# Altium PCB PCB.PcbDoc (part 2 of 2)
Units mil, origin at the board's own origin, x right, y up, seen from the top; angles counter-clockwise.
Board outline 6000 x 4000 mil, 2 copper layers (Top Layer, Bottom Layer); 94 components, 44 nets, 296 pads, 0 vias.
Unrouted connection lines stored in the file: 197.
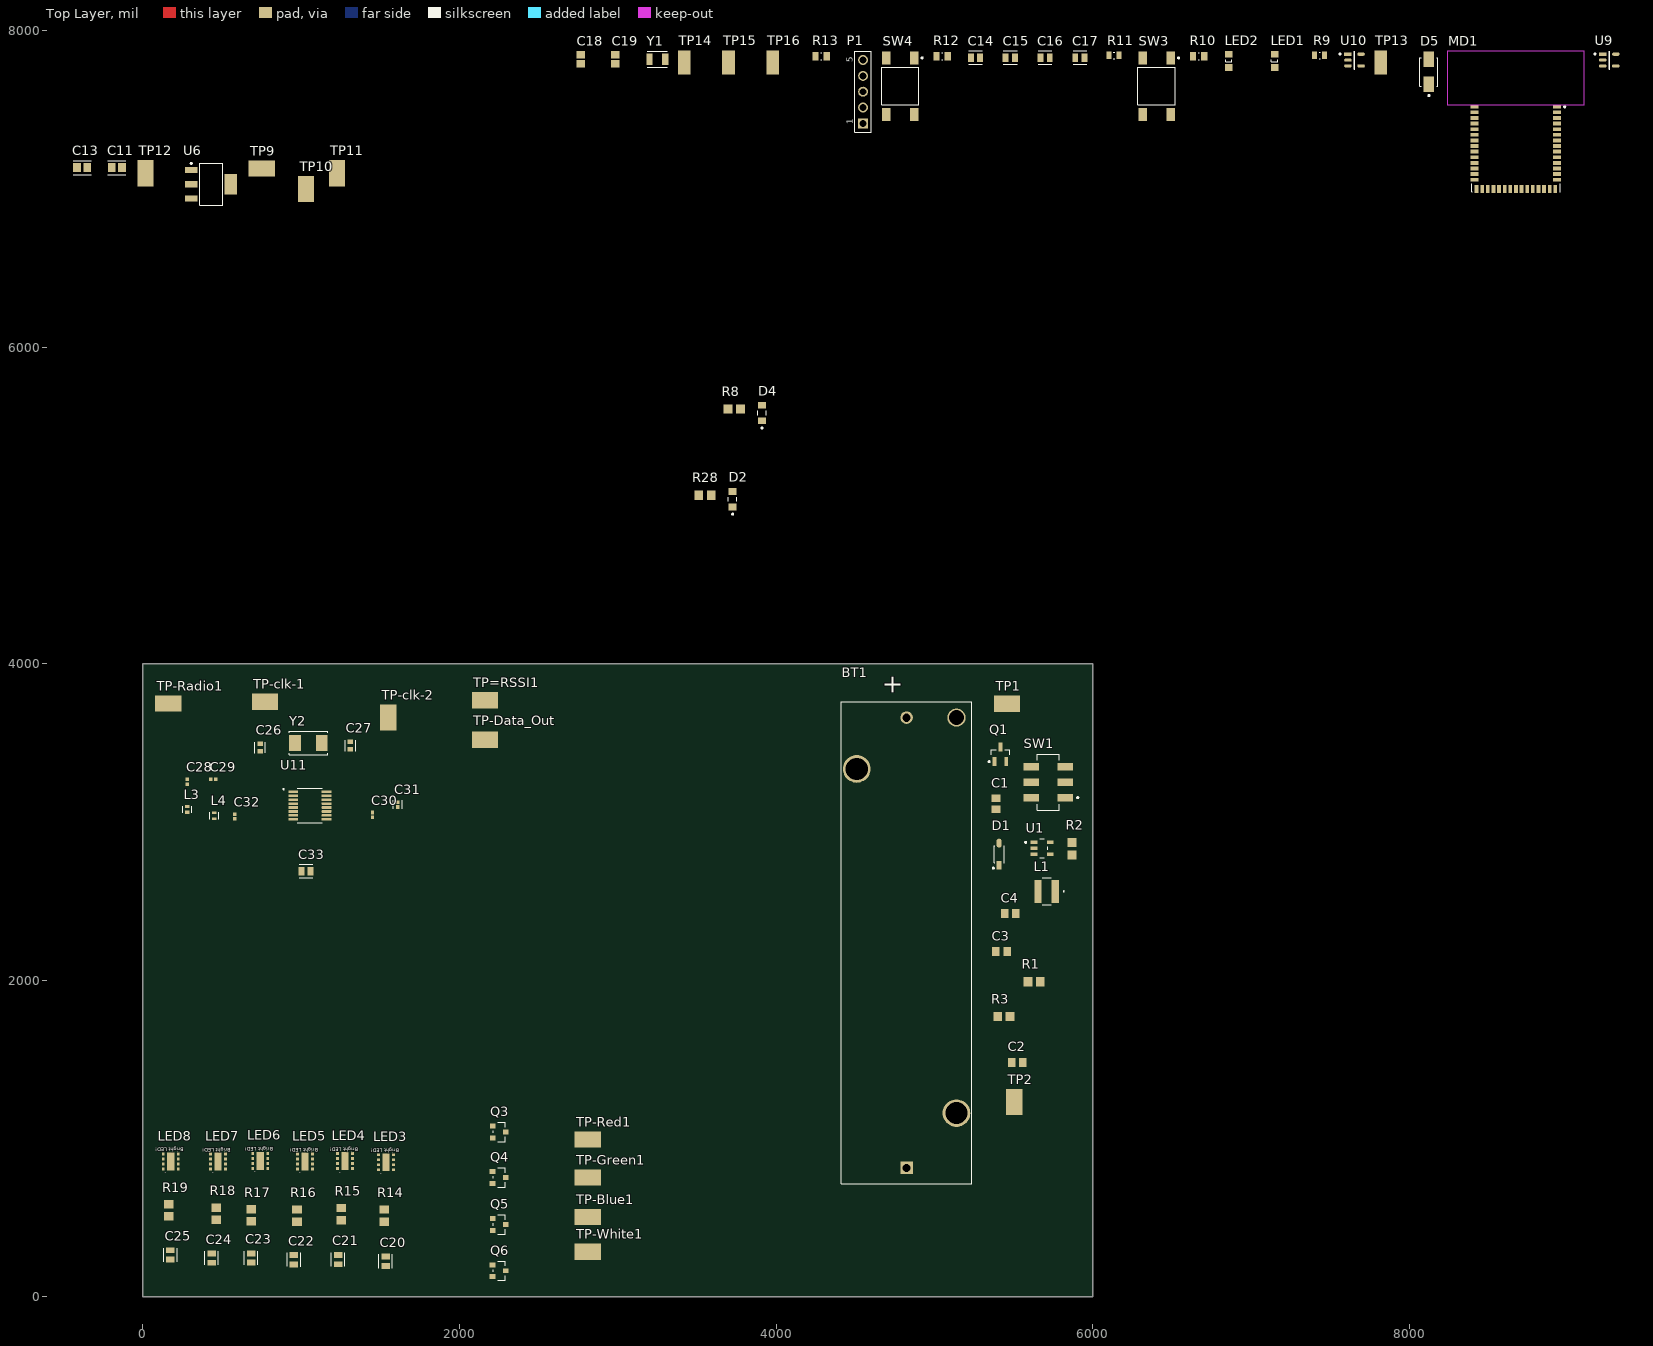
[diagram p0: Top Layer view]

## Part data (continued)
R2: "RES SMD 10K OHM 1% 1/8W 0805", Case Code (Imperial)=0805, Case Code (Metric)=2012, Manufacturer 1=Yageo, Manufacturer Part Number 1=RC0805FR-0710KL, Max Operating Temperature=155°C, Max Power Dissipation=125mW, Min Operating Temperature=-55°C, Package Quantity=1, Resistance=100kR, Resistance Tolerance=1%, Resistor Type="Thick Film", Supplier Part Number 1=311-10.0KCRCT-ND, Temperature Coefficient=100ppm/°C, Voltage Rating=150V, Case/Package=0805, Category="Chip SMD Resistors", ComponentLink1Description=https://datasheet.ciiva.com/11808/0900766b8106beab-11808151.pdf?src-supplier=RSComponents, ComponentLink1URL=https://datasheet.ciiva.com/11808/0900766b8106beab-11808151.pdf?src-supplier=RSComponents, ComponentLink2Description=https://datasheet.ciiva.com/12669/rc0805-12669688.pdf?src-supplier=Mouser, ComponentLink2URL=https://datasheet.ciiva.com/12669/rc0805-12669688.pdf?src-supplier=Mouser, ComponentLink3Description=https://datasheet.ciiva.com/46447/444164-46447563.pdf?src-supplier=Element14, ComponentLink3URL=https://datasheet.ciiva.com/46447/444164-46447563.pdf?src-supplier=Element14, ComponentLink4Description=https://datasheet.ciiva.com/2456/pyu-r-int-thick-7-2456972.pdf?src-supplier=Digi-Key, ComponentLink4URL=https://datasheet.ciiva.com/2456/pyu-r-int-thick-7-2456972.pdf?src-supplier=Digi-Key, ComponentLink5Description=https://datasheet.ciiva.com/2456/pyu-r-int-thick-7-2456973.pdf?src-supplier=Digi-Key, ComponentLink5URL=https://datasheet.ciiva.com/2456/pyu-r-int-thick-7-2456973.pdf?src-supplier=Digi-Key, ComponentLink6Description=https://datasheet.ciiva.com/2456/pyu-r-int-thick-7-2456974.pdf?src-supplier=Digi-Key, ComponentLink6URL=https://datasheet.ciiva.com/2456/pyu-r-int-thick-7-2456974.pdf?src-supplier=Digi-Key, ComponentLink7Description=https://datasheet.ciiva.com/16747/rc0805-16747087.pdf?src-supplier=Future+Electronics, ComponentLink7URL=https://datasheet.ciiva.com/16747/rc0805-16747087.pdf?src-supplier=Future+Electronics, Construction=Rectangular, Depth=1.25mm, Features="Moisture Resistant", Height=0.024inch, Lead Free="Lead Free", Length=2mm, Military Standard=Not, Number of Terminations=2, Packaging="Tape and Reel", Power Rating=125mW, Pricing 1="1=0.10000, 10=0.04200, 100=0.01690, 1000=0.00759, 2500=0.00659 (USD)", REACH SVHC=Unknown, RoHS=Yes, RoHS Compliant=Yes, Series=RC, Size Code=0805, Stock 1=7562122, Supplier 1=Digi-Key, Technology="THICK FILM", Termination=SMD/SMT, Tolerance=1%, Width=0.049inch
R3: "RES SMD 10K OHM 1% 1/8W 0805", Case Code (Imperial)=0805, Case Code (Metric)=2012, Manufacturer 1=Yageo, Manufacturer Part Number 1=RC0805FR-0710KL, Max Operating Temperature=155°C, Max Power Dissipation=125mW, Min Operating Temperature=-55°C, Package Quantity=1, Resistance=10kR, Resistance Tolerance=1%, Resistor Type="Thick Film", Supplier Part Number 1=311-10.0KCRCT-ND, Temperature Coefficient=100ppm/°C, Voltage Rating=150V, Case/Package=0805, Category="Chip SMD Resistors", ComponentLink1Description=https://datasheet.ciiva.com/11808/0900766b8106beab-11808151.pdf?src-supplier=RSComponents, ComponentLink1URL=https://datasheet.ciiva.com/11808/0900766b8106beab-11808151.pdf?src-supplier=RSComponents, ComponentLink2Description=https://datasheet.ciiva.com/12669/rc0805-12669688.pdf?src-supplier=Mouser, ComponentLink2URL=https://datasheet.ciiva.com/12669/rc0805-12669688.pdf?src-supplier=Mouser, ComponentLink3Description=https://datasheet.ciiva.com/46447/444164-46447563.pdf?src-supplier=Element14, ComponentLink3URL=https://datasheet.ciiva.com/46447/444164-46447563.pdf?src-supplier=Element14, ComponentLink4Description=https://datasheet.ciiva.com/2456/pyu-r-int-thick-7-2456972.pdf?src-supplier=Digi-Key, ComponentLink4URL=https://datasheet.ciiva.com/2456/pyu-r-int-thick-7-2456972.pdf?src-supplier=Digi-Key, ComponentLink5Description=https://datasheet.ciiva.com/2456/pyu-r-int-thick-7-2456973.pdf?src-supplier=Digi-Key, ComponentLink5URL=https://datasheet.ciiva.com/2456/pyu-r-int-thick-7-2456973.pdf?src-supplier=Digi-Key, ComponentLink6Description=https://datasheet.ciiva.com/2456/pyu-r-int-thick-7-2456974.pdf?src-supplier=Digi-Key, ComponentLink6URL=https://datasheet.ciiva.com/2456/pyu-r-int-thick-7-2456974.pdf?src-supplier=Digi-Key, ComponentLink7Description=https://datasheet.ciiva.com/16747/rc0805-16747087.pdf?src-supplier=Future+Electronics, ComponentLink7URL=https://datasheet.ciiva.com/16747/rc0805-16747087.pdf?src-supplier=Future+Electronics, Construction=Rectangular, Depth=1.25mm, Features="Moisture Resistant", Height=0.024inch, Lead Free="Lead Free", Length=2mm, Military Standard=Not, Number of Terminations=2, Packaging="Tape and Reel", Power Rating=125mW, Pricing 1="1=0.10000, 10=0.04200, 100=0.01690, 1000=0.00759, 2500=0.00659 (USD)", REACH SVHC=Unknown, RoHS=Yes, RoHS Compliant=Yes, Series=RC, Size Code=0805, Stock 1=7562122, Supplier 1=Digi-Key, Technology="THICK FILM", Termination=SMD/SMT, Tolerance=1%, Width=0.049inch
R8 R28: library part RES_0805_R_330.00, "RES 330 OHM 1% 1/8W 0805", Case Code (Imperial)=0805, Case Code (Metric)=2012, Manufacturer 1="Stackpole Electronics", Manufacturer Part Number 1=RMCF0805FT330R, Max Operating Temperature=155°C, Max Power Dissipation=125mW, Min Operating Temperature=-55°C, Resistance=330R, Resistor Type="Thick Film", Supplier Part Number 1=RMCF0805FT330RCT-ND, Temperature Coefficient=100ppm/°C, Tolerance=1%, Case/Package=0805, Category="Chip SMD Resistors", ComponentLink1Description=http://components.arrow.com/part/dataview/40963487S9848862N1174?src-supplier=Arrow+Electronics, ComponentLink1URL=http://components.arrow.com/part/dataview/40963487S9848862N1174?src-supplier=Arrow+Electronics, ComponentLink2Description=https://www.seielect.com/catalog/SEI-RMCF_RMCP.pdf?src-supplier=Avnet, ComponentLink2URL=https://www.seielect.com/catalog/SEI-RMCF_RMCP.pdf?src-supplier=Avnet, ComponentLink3Description=https://www.seielect.com/Catalog/SEI-RMCF_RMCP.pdf?src-supplier=Digi-Key, ComponentLink3URL=https://www.seielect.com/Catalog/SEI-RMCF_RMCP.pdf?src-supplier=Digi-Key, ComponentLink4Description=https://www.seielect.com/catalog/SEI-Packaging.pdf?src-supplier=Digi-Key, ComponentLink4URL=https://www.seielect.com/catalog/SEI-Packaging.pdf?src-supplier=Digi-Key, ComponentLink5Description=https://www.verical.com/server-webapp/html/getDatasheet?partID=559884&src-supplier=Verical, ComponentLink5URL=https://www.verical.com/server-webapp/html/getDatasheet?partID=559884&src-supplier=Verical, Construction=Rectangular, Contact Plating=Tin,Matte, Depth=1.25mm, Features="Automotive AEC-Q200", Height=0.026inch, Lead Free="Lead Free", Length=0.079inch, Military Standard=Not, Mount="Surface Mount", Number of Terminations=2, Packaging="Tape and Reel", Pricing 1="1=0.10000, 10=0.02700, 100=0.01090, 1000=0.00488, 2500=0.00423 (USD)", Radiation Hardening=No, RoHS=Yes, RoHS Compliant=Yes, Series=RMCF, Stock 1=205996, Supplier 1=Digi-Key, Width=0.049inch
R9 R11: library part CMP-2000-06960-1, "Chip Resistor, 330 Ohm, +/- 1%, 125 mW, -55 to 155 degC, 0805 (2012 Metric), RoHS, Tape and Reel", Case Code (Imperial)=0805, Case Code (Metric)=2012, Manufacturer=Yageo, Max Operating Temperature=155°C, Max Power Dissipation=125mW, Min Operating Temperature=-55°C, Operating Temperature Range=-55Cto+155C, Package Description="2-Pin Surface Mounted Device, Body 2 x 1.25 mm", Package Quantity=5000, Power Rating=125mW(1/8W), Resistance=330Ohms, Resistance Tolerance=1%, Resistor Type="Thick Film", Supplier Part Number 1=311-330CRCT-ND, Temperature Coefficient=100PPM/C, Voltage Rating=150V, Case Code - in=0805, Case Code - mm=2012, Case/Package=0805, Category="Chip SMD Resistors", ComponentLink1Description=https://datasheet.ciiva.com/2457/pyu-r-int-thick-7-2457015.pdf?src-supplier=Digi-Key, ComponentLink1URL=https://datasheet.ciiva.com/2457/pyu-r-int-thick-7-2457015.pdf?src-supplier=Digi-Key, ComponentLink2Description=https://datasheet.ciiva.com/2457/pyu-r-int-thick-7-2457016.pdf?src-supplier=Digi-Key, ComponentLink2URL=https://datasheet.ciiva.com/2457/pyu-r-int-thick-7-2457016.pdf?src-supplier=Digi-Key, ComponentLink3Description=https://datasheet.ciiva.com/2457/pyu-r-int-thick-7-2457014.pdf?src-supplier=Digi-Key, ComponentLink3URL=https://datasheet.ciiva.com/2457/pyu-r-int-thick-7-2457014.pdf?src-supplier=Digi-Key, ComponentLink4Description=https://datasheet.ciiva.com/12667/rc0805-12667925.pdf?src-supplier=Mouser, ComponentLink4URL=https://datasheet.ciiva.com/12667/rc0805-12667925.pdf?src-supplier=Mouser, ComponentLink5Description=https://datasheet.ciiva.com/7941/444164-7941768.pdf?src-supplier=Element14, ComponentLink5URL=https://datasheet.ciiva.com/7941/444164-7941768.pdf?src-supplier=Element14, ComponentLink6Description=https://datasheet.ciiva.com/7941/444164-7941769.pdf?src-supplier=Element14, ComponentLink6URL=https://datasheet.ciiva.com/7941/444164-7941769.pdf?src-supplier=Element14, ComponentLink7Description=https://datasheet.ciiva.com/16740/rc0805-16740975.pdf?src-supplier=Future+Electronics, ComponentLink7URL=https://datasheet.ciiva.com/16740/rc0805-16740975.pdf?src-supplier=Future+Electronics, Construction=Rectangular, Datasheet URL=http://www.yageo.com/documents/recent/PYu-RC_Group_51_RoHS_L_7.pdf, Datasheet Version="Rev. 7, 05/2017", Depth=1.25mm, Features="Moisture Resistant", Height=0.024inch, Lead Free="Lead Free", Length=2mm, Manufacturer 1=Yageo, Manufacturer Part Number 1=RC0805FR-07330RL, Manufacturer URL=http://www.yageo.com/, Military Standard=Not, Mounting Technology=SurfaceMount, Number of Terminations=2, Package Reference=0805, Packaging=Reel, Pricing 1="1=0.10000, 10=0.03800, 100=0.01560, 1000=0.00699, 2500=0.00607 (USD)", Product=ThickFilmResistorsGeneralPurpose, REACH SVHC=Unknown, RoHS=Yes, RoHS Compliant=Yes, Series=RC, Size Code=0805, Stock 1=1406392, Supplier 1=Digi-Key, Termination=SMD/SMT, Termination Style=SMD/SMT, Tolerance=1%, Width=0.049inch
R10 R12 R13: library part CMP-1659-00013-4, "Chip Resistor, 10 KOhm, +/- 1%, 0.125 W, -55 to 155 degC, 0805 (2012 Metric), RoHS, Tape and Reel", Case Code (Imperial)=0805, Case Code (Metric)=2012, Manufacturer=Yageo, Max Operating Temperature="155 degC", Max Power Dissipation=125mW, Min Operating Temperature="-55 degC", Package Quantity=5000, Resistance=10kR, Resistance Tolerance=1%, Resistor Type="Thick Film", Supplier Part Number 1=311-10.0KCRCT-ND, Temperature Coefficient=100ppm/°C, Voltage Rating="150 V", Case/Package=0805, Category="Chip SMD Resistors", ComponentLink1Description="Manufacturer URL", ComponentLink1URL=http://www.yageo.com/, ComponentLink2Description=Datasheet, ComponentLink2URL=http://www.yageo.com/documents/recent/PYu-RC_Group_51_RoHS_L_04.pdf, ComponentLink3Description=https://datasheet.ciiva.com/11808/0900766b8106beab-11808151.pdf?src-supplier=RSComponents, ComponentLink3URL=https://datasheet.ciiva.com/11808/0900766b8106beab-11808151.pdf?src-supplier=RSComponents, ComponentLink4Description=https://datasheet.ciiva.com/46447/444164-46447563.pdf?src-supplier=Element14, ComponentLink4URL=https://datasheet.ciiva.com/46447/444164-46447563.pdf?src-supplier=Element14, ComponentLink5Description=https://datasheet.ciiva.com/2456/pyu-r-int-thick-7-2456973.pdf?src-supplier=Digi-Key, ComponentLink5URL=https://datasheet.ciiva.com/2456/pyu-r-int-thick-7-2456973.pdf?src-supplier=Digi-Key, ComponentLink6Description=https://datasheet.ciiva.com/2456/pyu-r-int-thick-7-2456974.pdf?src-supplier=Digi-Key, ComponentLink6URL=https://datasheet.ciiva.com/2456/pyu-r-int-thick-7-2456974.pdf?src-supplier=Digi-Key, ComponentLink7Description=https://datasheet.ciiva.com/2456/pyu-r-int-thick-7-2456972.pdf?src-supplier=Digi-Key, ComponentLink7URL=https://datasheet.ciiva.com/2456/pyu-r-int-thick-7-2456972.pdf?src-supplier=Digi-Key, ComponentLink8Description=https://datasheet.ciiva.com/12669/rc0805-12669688.pdf?src-supplier=Mouser, ComponentLink8URL=https://datasheet.ciiva.com/12669/rc0805-12669688.pdf?src-supplier=Mouser, ComponentLink9Description=https://datasheet.ciiva.com/16747/rc0805-16747087.pdf?src-supplier=Future+Electronics, ComponentLink9URL=https://datasheet.ciiva.com/16747/rc0805-16747087.pdf?src-supplier=Future+Electronics, Construction=Rectangular, DatasheetVersion="Rev. 4, 02/2016", Depth=1.25mm, Features="Moisture Resistant", Height="0.5 mm", Lead Free="Lead Free", Length="2 mm", Manufacturer 1=Yageo, Manufacturer Part Number 1=RC0805FR-0710KL, Military Standard=Not, Mount="Surface Mount", Mounting Technology="Surface Mount", Number of Terminations=2, PackageDescription="2-Pin Surface Mounted Device, Body 2 x 1.25 mm", PackageReference=0805, Packaging="Tape and Reel", Pins=2, Power Rating=125mW, Pricing 1="1=0.10000, 10=0.03800, 100=0.01560, 1000=0.00702, 2500=0.00610 (USD)", REACH SVHC="No SVHC", RoHS=Yes, RoHS Compliant=Yes, RoHSCompliant=true, Series=RC, Size Code=0805, Stock 1=5682818, Supplier 1=Digi-Key, Technology="THICK FILM", Termination=SMD/SMT, Tolerance=1%, Width=0.049inch
R14 R15 R16 R17 R18 R19: library part CMP-2001-03134-1, Manufacturer=Susumu, Part Number=RL1220S-100-F
SW1: "C & K COMPONENTS - JS202011SCQN - SWITCH, DPDT, 0.6A, 6VDC, SMD", Actuator Color=Black, Contact Current Rating=300mA, Contact Resistance=70mR, Flammability Rating="UL94 V-2", Manufacturer 1="ITT C&K", Max Operating Temperature=85°C, Max Voltage Rating (DC)=6V, Min Operating Temperature=-20°C, Package Quantity=1, Supplier Part Number 1=401-2002-1-ND, Actuator Length=2mm, Actuator Material=Nylon,Polyamide,PA46, Actuator Type=Standard, Category="Slide Switches", ComponentLink1Description=https://datasheet.ciiva.com/2889/js-29aug13-2889127.pdf?src-supplier=Digi-Key, ComponentLink1URL=https://datasheet.ciiva.com/2889/js-29aug13-2889127.pdf?src-supplier=Digi-Key, ComponentLink2Description=https://datasheet.ciiva.com/23829/1707718-23829488.pdf?src-supplier=Newark, ComponentLink2URL=https://datasheet.ciiva.com/23829/1707718-23829488.pdf?src-supplier=Newark, ComponentLink3Description=https://datasheet.ciiva.com/8625/js-9dec14-8625470.pdf?src-supplier=Avnet, ComponentLink3URL=https://datasheet.ciiva.com/8625/js-9dec14-8625470.pdf?src-supplier=Avnet, ComponentLink4Description=https://datasheet.ciiva.com/2889/js-15sept15-2889128.pdf?src-supplier=Digi-Key, ComponentLink4URL=https://datasheet.ciiva.com/2889/js-15sept15-2889128.pdf?src-supplier=Digi-Key, ComponentLink5Description=https://datasheet.ciiva.com/2889/js-15sept15-2889129.pdf?src-supplier=Digi-Key, ComponentLink5URL=https://datasheet.ciiva.com/2889/js-15sept15-2889129.pdf?src-supplier=Digi-Key, ComponentLink6Description=https://datasheet.ciiva.com/22630/1707718-22630697.pdf?src-supplier=Element14, ComponentLink6URL=https://datasheet.ciiva.com/22630/1707718-22630697.pdf?src-supplier=Element14, Contact Material="Copper Alloy", Contact Plating=Silver, Current Rating=300mA, Depth=7.5mm, Electrical Life=5000Cycles, Housing Material=Nylon, Lead Free="Lead Free", Length=9mm, Manufacturer Part Number 1=JS202011SCQN, Max Current Rating=300mA, Mount="Surface Mount", Orientation=Vertical, Packaging="Tape and Reel", Pricing 1="1=0.55000, 10=0.53000, 25=0.51040, 100=0.44180, 250=0.40252, 500=0.37306 (USD)", Radiation Hardening=No, REACH SVHC="No SVHC", RoHS=Yes, Series=JS, Stock 1=21096, Supplier 1=Digi-Key, Switch Function=On-On, Switch Travel=2mm, Termination="Gull Wing", Throw Configuration=DPDT, Voltage Rating (DC)=6V
SW3 SW4: library part CMP-2000-05602-2, "Swicth, SPST, 24 V, -35 to 85 degC, 4-Pin SMD, RoHS, Tape and Reel", Case/Package=SMD/SMT, Color=Black, Contact Current Rating=50mA, Contact Resistance=100mOhm, Insulation Resistance=100MR, Manufacturer="TE Connectivity", Max Operating Temperature=85degC, Max Voltage Rating (DC)=12V, Min Operating Temperature=-35degC, Operating Force=1.57N, Package Description="4-Pin Surface Mount Device, Body 6 x 6 mm, Pitch 4.5 mm", Package Quantity=750, Supplier Part Number 1=450-1129-ND, Voltage Rating=24V, Actuator Length=0.055inch, Actuator Material=Polyamide, Actuator Type=Standard, Case\/Package=SMD/SMT, Category="Pushbutton Switches", Contact Material=CopperAlloy, Contact Plating=Silver, Current Rating=50mA, Datasheet URL=http://www.te.com/commerce/DocumentDelivery/DDEController?Action=showdoc&DocId=Customer+Drawing%7F2-1437565-7%7FV%7Fpdf%7FEnglish%7FENG_CD_2-1437565-7_V.pdf%7F4-1437565-2, Datasheet Version="Rev. V, 02/2015", Depth=10mm, Electrical Life=100000Cycles, ELV=Compliant, Illumination Type=Illuminated, Lead Free="Lead Free", Length=6mm, Manufacturer 1="TE Connectivity", Manufacturer Part Number 1=FSM4JSMA, Manufacturer URL=http://www.te.com/, Max Current Rating=50mA, Mechanical Life=100000Cycles, Mount=SurfaceMount, Mounting Technology=SurfaceMount, Orientation=Straight, Package Reference=FSM4JSMA, Packaging=LoosePiece, Pricing 1="1=0.27000, 10=0.26300, 25=0.24960, 100=0.22600, 250=0.20604, 750=0.19152, 1500=0.16339, 3000=0.15885, 5250=0.14977 (USD)", Radiation Hardening=No, REACH SVHC=Unknown, RoHS=Yes, RoHS Compliant=Yes, RoHSCompliant=true, Series=FSMJSMA, Stock 1=65608, Supplier 1=Digi-Key, Switch Function=Off-Mom, Switch Travel=0.25mm, Termination=GullWing, Throw Configuration=SPST, Voltage Rating (DC)=24V, Width=6mm
TP1 TP2 TP9 TP10 TP11 TP12 TP-Blue1 TP-clk-1 TP-clk-2 TP-Data_Out TP-Green1 TP-Radio1 TP-Red1 TP-White1 TP=RSSI1: "Test Point SMD 1206", Case Size=1206, Manufacturer="TE Connectivity (Tyco Electronics)", Manufacturer Part Number=1625854-1, Operating Temperature="-55 to 125 C", Power Rating=N/R, Resistance Value="0 Ohm", Supplier Part Number=A106143CT-ND, ComponentLink1Description=https://datasheet.ciiva.com/6439/eng-ds-1773266-a-6439169.pdf, ComponentLink1URL=https://datasheet.ciiva.com/6439/eng-ds-1773266-a-6439169.pdf, ComponentLink2Description=https://datasheet.ciiva.com/30136/1773266-a-30136341.pdf, ComponentLink2URL=https://datasheet.ciiva.com/30136/1773266-a-30136341.pdf, ComponentLink3Description=https://datasheet.ciiva.com/6439/eng-ds-1773266-a-6439080.pdf, ComponentLink3URL=https://datasheet.ciiva.com/6439/eng-ds-1773266-a-6439080.pdf, ComponentLink4Description=https://datasheet.ciiva.com/6439/eng-ds-1773266-a-6439081.pdf, ComponentLink4URL=https://datasheet.ciiva.com/6439/eng-ds-1773266-a-6439081.pdf, ComponentLink5Description=https://datasheet.ciiva.com/6439/eng-ds-1773266-a-6439083.pdf, ComponentLink5URL=https://datasheet.ciiva.com/6439/eng-ds-1773266-a-6439083.pdf, Dimension="3.2 x 1.6 x 1.25mm", Family=RC, Mounting="Surface Mount", Packaging="Tape and Reel", Part No=1625854-1, Pricing 1="1=0.28, 10=0.261, 25=0.224, 50=0.1902, 100=0.1828, 250=0.1641, 500=0.1567, 1000=0.1306 (USD)", RoHS=Yes, Stock 1=31937, Supplier=Digi-Key, Temperature Coefficient=N/R, Terminal Pitch=N/R, Termination Style=N/R, Tolerance=N/R
TP13 TP14 TP15 TP16: library part CMP-1672-00008-1, "Test Point, 1 Position SMD, RoHS, Tape and Reel", Manufacturer 1="Keystone Electronics", Package Quantity=1000, Supplier Part Number 1=36-5019CT-ND, Category=Connectors, ComponentLink1Description="Manufacturer URL", ComponentLink1URL=http://www.keyelco.com/, ComponentLink2Description=Datasheet, ComponentLink2URL=http://www.keyelco.com/product-pdf.cfm?p=1357, ComponentLink3Description=https://datasheet.ciiva.com/16318/m60-2p61-16318395.pdf?src-supplier=Future+Electronics, ComponentLink3URL=https://datasheet.ciiva.com/16318/m60-2p61-16318395.pdf?src-supplier=Future+Electronics, ComponentLink4Description=https://datasheet.ciiva.com/16885/70182998-16885945.pdf?src-supplier=Allied+Electronics, ComponentLink4URL=https://datasheet.ciiva.com/16885/70182998-16885945.pdf?src-supplier=Allied+Electronics, ComponentLink5Description=https://datasheet.ciiva.com/14848/m60-2p61-14848437.pdf?src-supplier=Digi-Key, ComponentLink5URL=https://datasheet.ciiva.com/14848/m60-2p61-14848437.pdf?src-supplier=Digi-Key, ComponentLink6Description=https://datasheet.ciiva.com/14848/m60-2p61-14848438.pdf?src-supplier=Digi-Key, ComponentLink6URL=https://datasheet.ciiva.com/14848/m60-2p61-14848438.pdf?src-supplier=Digi-Key, ComponentLink7Description=https://datasheet.ciiva.com/14848/m60-2p61-14848439.pdf?src-supplier=Digi-Key, ComponentLink7URL=https://datasheet.ciiva.com/14848/m60-2p61-14848439.pdf?src-supplier=Digi-Key, Contact Material=Bronze, Contact Plating=Silver, DatasheetVersion=03/2014, Height=0.09inch, Lead Free="Lead Free", Manufacturer Part Number 1=5019, Material=Bronze, Mount="Surface Mount", Mounting Technology="Surface Mount", Number of Pins=1, PackageDescription="1-Pin Surface Mount Device, Body 3.81 x 2.03 mm", PackageReference=5019, Packaging="Tape and Reel", Pins=1, Pricing 1="1=0.34000, 25=0.27360, 100=0.22340, 250=0.20064, 500=0.19152 (USD)", REACH SVHC="No SVHC", RoHS=Yes, RoHS Compliant=Yes, RoHSCompliant=True, Series=5019, Stock 1=1316816, Supplier 1=Digi-Key, Termination=SMD/SMT
U1: "IC REG MULT CONFG ADJ 2.1A SOT23", Case/Package=SOT-23, Manufacturer 1="TI National Semiconductor", Manufacturer Part Number 1=LM2735XMF/NOPB, Max Input Voltage=5.5V, Max Operating Temperature=125°C, Max Output Current=3A, Max Output Voltage=24V, Min Input Voltage=2.7V, Min Operating Temperature=-40°C, Min Output Voltage=3V, Nominal Supply Current=500uA, Package Quantity=1000, Quiescent Current=7mA, Supplier Part Number 1=LM2735XMF/NOPBCT-ND, Switching Frequency=1.6MHz, Category="Voltage Regulators - Switching", ComponentLink1Description=https://datasheet.ciiva.com/22669/1802021-22669478.pdf?src-supplier=Element14, ComponentLink1URL=https://datasheet.ciiva.com/22669/1802021-22669478.pdf?src-supplier=Element14, ComponentLink2Description=https://datasheet.ciiva.com/3220/lm2735-3220073.pdf?src-supplier=Avnet, ComponentLink2URL=https://datasheet.ciiva.com/3220/lm2735-3220073.pdf?src-supplier=Avnet, ComponentLink3Description=https://datasheet.ciiva.com/3221/lm2735-3221644.pdf?src-supplier=Avnet, ComponentLink3URL=https://datasheet.ciiva.com/3221/lm2735-3221644.pdf?src-supplier=Avnet, ComponentLink4Description=https://datasheet.ciiva.com/6579/lm2735-6579929.pdf?src-supplier=Digi-Key, ComponentLink4URL=https://datasheet.ciiva.com/6579/lm2735-6579929.pdf?src-supplier=Digi-Key, ComponentLink5Description=https://datasheet.ciiva.com/6579/lm2735-6579933.pdf?src-supplier=Digi-Key, ComponentLink5URL=https://datasheet.ciiva.com/6579/lm2735-6579933.pdf?src-supplier=Digi-Key, ComponentLink6Description=https://datasheet.ciiva.com/6579/lm2735-6579935.pdf?src-supplier=Digi-Key, ComponentLink6URL=https://datasheet.ciiva.com/6579/lm2735-6579935.pdf?src-supplier=Digi-Key, ComponentLink7Description=https://datasheet.ciiva.com/15223/getdatasheetpartid-142075-15223063.pdf?src-supplier=Verical, ComponentLink7URL=https://datasheet.ciiva.com/15223/getdatasheetpartid-142075-15223063.pdf?src-supplier=Verical, Contact Plating=Tin,Matte, Efficiency=90%, Height=1.02mm, Lead Free="Lead Free", Length=2.92mm, Min Supply Voltage=2.7V, Mount="Surface Mount", Number of Outputs=1, Number of Pins=5, Operating Supply Voltage=5.5V, Output Current=3A, Output Type=Adjustable, Output Voltage=24V, Packaging="Tape and Reel", Pricing 1="1=2.27000, 10=2.03900, 25=1.92400, 100=1.63920, 250=1.53912, 500=1.34672 (USD)", Radiation Hardening=No, REACH SVHC="No SVHC", RoHS=Yes, RoHS Compliant=Yes, Series=LM2735, Stock 1=5135, Supplier 1=Digi-Key, Supply Current=500uA, Synchronous Rectifier=No, Topology=Boost,SEPIC, Width=1.6mm
U6: library part CMP-0395-00499-2, "Single Output LDO, 1 A, Fixed 3.3 V Output, 2 to 5.5 V Input, 4-pin SOT-223 (DCY), -40 to 125 degC, Green (RoHS & no Sb/Br)", Manufacturer="Texas Instruments", Accuracy(%)=2, Code_JEDEC=TO-261, ComponentLink1Description="Manufacturer URL", ComponentLink1URL=http://www.ti.com/, ComponentLink2Description=Datasheet, ComponentLink2URL=http://www.ti.com/general/docs/lit/getliterature.tsp?genericPartNumber=TLV1117LV33&fileType=pdf, ComponentLink3Description="Package Specification", ComponentLink3URL=http://www.ti.com/litv/pdf/mpds094a, DatasheetVersion=SBVS160A, Eco-Plan="Green (RoHS & no Sb/Br)", Fixed Output Options(V)=3.3, Iout(Max)(A)=1, Iq(Typ)(mA)=0.05, Mounting Technology="Surface Mount", PackageDescription="4-Pin Plastic Small Outline, Body 3.5 x 6.5 mm, Pitch 2.3 mm", PackageReference=DCY0004A, PackageVersion=4202506/B, PartNumber=TLV1117LV33DCYT, SubFamily="Single Channel LDO", Vdo(Typ)(mV)=1200, Vin(Max)(V)=5.5, Vin(Min)(V)=2, Vout Adj(Max)(V)=3.3, Vout Adj(Min)(V)=3.3
U9 U10: library part CMP-04903-000082-1, "IC GATE AND 1CH 2-INP SOT23-5", Manufacturer 1="Texas Instruments", Supplier Part Number 1=296-SN74AHC1G08DBV3CT-ND, Category="Logic Gates", ComponentLink1Description=http://www.ti.com/general/docs/suppproductinfo.tsp?distId=10&amp;gotoUrl=http%3A%2F%2Fwww.ti.com%2Flit%2Fgpn%2Fsn74ahc1g08&src-supplier=Digi-Key, ComponentLink1URL=http://www.ti.com/general/docs/suppproductinfo.tsp?distId=10&amp;gotoUrl=http%3A%2F%2Fwww.ti.com%2Flit%2Fgpn%2Fsn74ahc1g08&src-supplier=Digi-Key, Logic Function="AND GATE", Manufacturer Part Number 1=SN74AHC1G08DBV3, Pricing 1="1=0.53000, 10=0.42800, 25=0.39200, 100=0.29170, 250=0.26436, 500=0.21878, 1000=0.16409 (USD)", RoHS=Yes, RoHS Compliant=Yes, Stock 1=11940, Supplier 1=Digi-Key
U11: "No Description Available", Mfr_Name=Microchip, Supplier Part Number 1=MICRF220AYQS-CT-ND, Copyright="Copyright (C) 2022 Ultra Librarian. All rights reserved.", Manufacturer_Part_Number=MICRF220AYQS, RefDes=RefDes, Supplier 1=Digi-Key, Type=DEV
Y1: library part CMP-2000-07587-2, "CRYSTAL 32.7680KHZ 6PF SMD", Case/Package=SMD/SMT, ESR (Equivalent Series Resistance)=55kR, Frequency=32.768kHz, Frequency Tolerance=20ppm, Load Capacitance=6pF, Manufacturer 1=Abracon, Manufacturer Part Number 1=ABS07-120-32.768KHZ-T, Max Operating Temperature=85°C, Min Operating Temperature=-40°C, Operating Frequency="32.768 kHz", Package Quantity=3000, Series Resistance=60kR, Supplier Part Number 1=535-11937-1-ND, Category=Crystals, ComponentLink1Description=https://datasheet.ciiva.com/6728/abs07-120-32-768khz-t-6728893.pdf?src-supplier=Digi-Key, ComponentLink1URL=https://datasheet.ciiva.com/6728/abs07-120-32-768khz-t-6728893.pdf?src-supplier=Digi-Key, ComponentLink2Description=https://datasheet.ciiva.com/12387/abs07-120-32-768khz-t-218607-12387629.pdf?src-supplier=Mouser, ComponentLink2URL=https://datasheet.ciiva.com/12387/abs07-120-32-768khz-t-218607-12387629.pdf?src-supplier=Mouser, ComponentLink3Description=https://datasheet.ciiva.com/15214/getdatasheetpartid-722402-15214953.pdf?src-supplier=Verical, ComponentLink3URL=https://datasheet.ciiva.com/15214/getdatasheetpartid-722402-15214953.pdf?src-supplier=Verical, Depth=1.5mm, Height=0.035inch, Lead Free="Lead Free", Length=3.2mm, Mount="Surface Mount", Number of Pins=2, Packaging="Tape and Reel", Pricing 1="1=1.20000, 10=1.15000, 50=1.12340, 100=0.96290, 500=0.93616, 1000=0.78905 (USD)", Radiation Hardening=No, REACH SVHC="No SVHC", RoHS=Yes, RoHS Compliant=Yes, Series=ABS07, Stock 1=273340, Supplier 1=Digi-Key, Termination=SMD/SMT, Tolerance=20ppm, Width=0.061inch
Y2: library part CMP-27762-013605-1, "Crystal 9.81563MHz ±30ppm 10pF SMD-2 6mm x 3.5mm", Case/Package=SMD/SMT, ESR (Equivalent Series Resistance)=50R, Frequency Stability=100ppm, Frequency Tolerance=30ppm, Load Capacitance=10pF, Max Operating Temperature=85°C, Min Operating Temperature=-40°C, Frequency=9.81563MHz, Height=0.055inch, Length=0.236inch, Mount="Surface Mount", Packaging="Tape and Reel", Width=0.138inch

## Nets (pads, with @x,y where several pads share a name; then routed paths per layer and width w, separated by ;. In a path a pad name is that pad's centre, name@x,y a point inside that pad or via, vN(x,y) a via of type N, cw(c..) or ccw(c..) an arc to the next point about the centre after c; other vN are vias at no path point)
3.3V: C11.1 C14.1 C15.1 C16.1 C17.1 C20.1 C21.1 C22.1 C23.1 C24.1 C25.1 C32.1 C33.1 D5.1 MD1.4 R9.2 R10.2 R12.2 R13.2 R14.1 R15.1 R16.1 R17.1 R18.1 R19.1 TP12.1 U6.2 U6.4 U9.5 U10.5 U11.5
3V3_PWR_GOOD: D2.2 U9.1
5.0V: C2.2 C3.2 C4.2 C13.1 D1.1 R1.1 TP2.1 U6.3
5V0_PWR_GOOD: D4.2
ANT: BT1.1 C1.1 C2.1 C4.1 C11.2 C13.2 C14.2 C15.2 C16.2 C17.2 C18.1 C19.1 C20.2 C21.2 C22.2 C23.2 C24.2 C25.2 C26.1 C27.2 C29.2 C30.2 C31.2 C32.2 C33.2 L3.1 L4.1 L4.2 MD1.1 MD1.15 MD1.43 P1.2 Q1.1 Q3.3 Q4.3 Q5.3 Q6.3 R3.1 R8.1 R11.1 R28.1 SW3.3 SW4.1 SW4.3 TP9.1 TP10.1 TP11.1 TP14.1 TP15.1 TP16.1 TP-Radio1.1 U1.2 U6.1 U9.3 U10.3 U11.2 U11.3 U11.4 U11.6 U11.7 U11.8 U11.9 U11.11
Blue: MD1.33 Q6.1
CAFGC: C31.1 U11.13
CTH: C30.1 U11.12
"Data Out": MD1.8 TP-Data_Out.1 U11.10
EN: R2.1 U1.4
FB: C3.1 R1.2 R3.2 U1.3
"FET SW": Q1.3 SW1.3 SW1.6
GREEN: LED3.6 LED4.6 LED5.6 LED6.6 LED7.6 LED8.6 Q4.2 TP-Green1.1
NetC28_1: C28.1 L3.2
NetC28_2: C28.2 C29.1
NetD2_1: D2.1 R28.2
NetD4_1: D4.1 R8.2
NetLED3_1: LED3.1 LED3.2 LED3.3 LED3.4 R14.2
NetLED4_1: LED4.1 LED4.2 LED4.3 LED4.4 R15.2
NetLED5_1: LED5.1 LED5.2 LED5.3 LED5.4 R16.2
NetLED6_1: LED6.1 LED6.2 LED6.3 LED6.4 R17.2
NetLED7_1: LED7.1 LED7.2 LED7.3 LED7.4 R18.2
NetLED8_1: LED8.1 LED8.2 LED8.3 LED8.4 R19.2
NetTP=RSSI1_1: TP=RSSI1.1 U11.14
P0_0: C18.2 MD1.5 Y1.1
P0_1: C19.2 MD1.6 Y1.2
PB_IN: MD1.39 R12.1 SW4.2 SW4.4
PRG_RESET_N: P1.3 R13.1 U10.2
RED: LED3.5 LED4.5 LED5.5 LED6.5 LED7.5 LED8.5 Q3.2 TP-Red1.1
RESET1: U9.4 U10.1
RESET_N: R10.1 SW3.2 U9.2
RO1: C26.2 TP-clk-1.1 U11.1 Y2.1
RO2: C27.1 TP-clk-2.1 U11.16 Y2.2
SW: D1.2 L1.2 U1.1
SWDCLK: MD1.26 P1.4
SWDIO: MD1.27 P1.5
USR_LED: LED2.2 MD1.36
USR_LED_R: LED2.1 R11.2
VBAT_POS: BT1.2 Q1.2 TP1.1
VIN: C1.2 L1.1 R2.2 SW1.2 SW1.5 U1.5
VTARG: D5.2 P1.1
White: MD1.10 Q5.1
XRES_N: LED1.1 MD1.42 TP13.1 U10.4
XRES_N_R: LED1.2 R9.1
pads on no net: BT1. LED3.7 LED3.8 LED4.7 LED4.8 LED5.7 LED5.8 LED6.7 LED6.8 LED7.7 LED7.8 LED8.7 LED8.8 MD1.2 MD1.3 MD1.7 MD1.9 MD1.11 MD1.12 MD1.13 MD1.14 MD1.16 MD1.17 MD1.18 MD1.19 MD1.20 MD1.21 MD1.22 MD1.23 MD1.24 MD1.25 MD1.28 MD1.29 MD1.30 MD1.31 MD1.32 MD1.34 MD1.35 MD1.37 MD1.38 MD1.40 MD1.41 Q3.1 Q4.1 Q5.2 Q6.2 SW1.1 SW1.4 SW3.1 SW3.4 TP-Blue1.1 TP-White1.1 U11.15

## Text inside footprints (layer, text, board x,y; h text height)
BT1: Top Overlay "+" at 4825,3802.46 h196.85 r90
LED3: Top Overlay "-" at 1508.58,787.04 h17.72 r179.56; Top Overlay "Bright LED!" at 1618.82,945.93 h39.37 r180
LED4: Top Overlay "-" at 1248.58,794.05 h17.72 r179.56; Top Overlay "Bright LED!" at 1358.82,952.93 h39.37 r180
LED5: Top Overlay "-" at 995.82,791.29 h17.72 r179.56; Top Overlay "Bright LED!" at 1106.06,950.18 h39.37 r180
LED6: Top Overlay "-" at 713.06,795.54 h17.72 r179.56; Top Overlay "Bright LED!" at 823.31,954.43 h39.37 r180
LED7: Top Overlay "-" at 445.82,791.29 h17.72 r179.56; Top Overlay "Bright LED!" at 556.06,950.18 h39.37 r180
LED8: Top Overlay "-" at 147.95,792.08 h17.72 r179.56; Top Overlay "Bright LED!" at 258.19,950.97 h39.37 r180
P1: Top Overlay "5" at 4483.07,7800.04 h40 r90; Top Overlay "1" at 4483.07,7410.28 h40 r90